# Altium PCB PCB.PcbDoc
Units mil, origin at the board's own origin, x right, y up, seen from the top; angles counter-clockwise.
Board outline 1780.61 x 1630.16 mil, 2 copper layers (Top Layer, Bottom Layer); 38 components, 46 nets, 181 pads, 91 vias.
Unrouted connection lines stored in the file: 17.
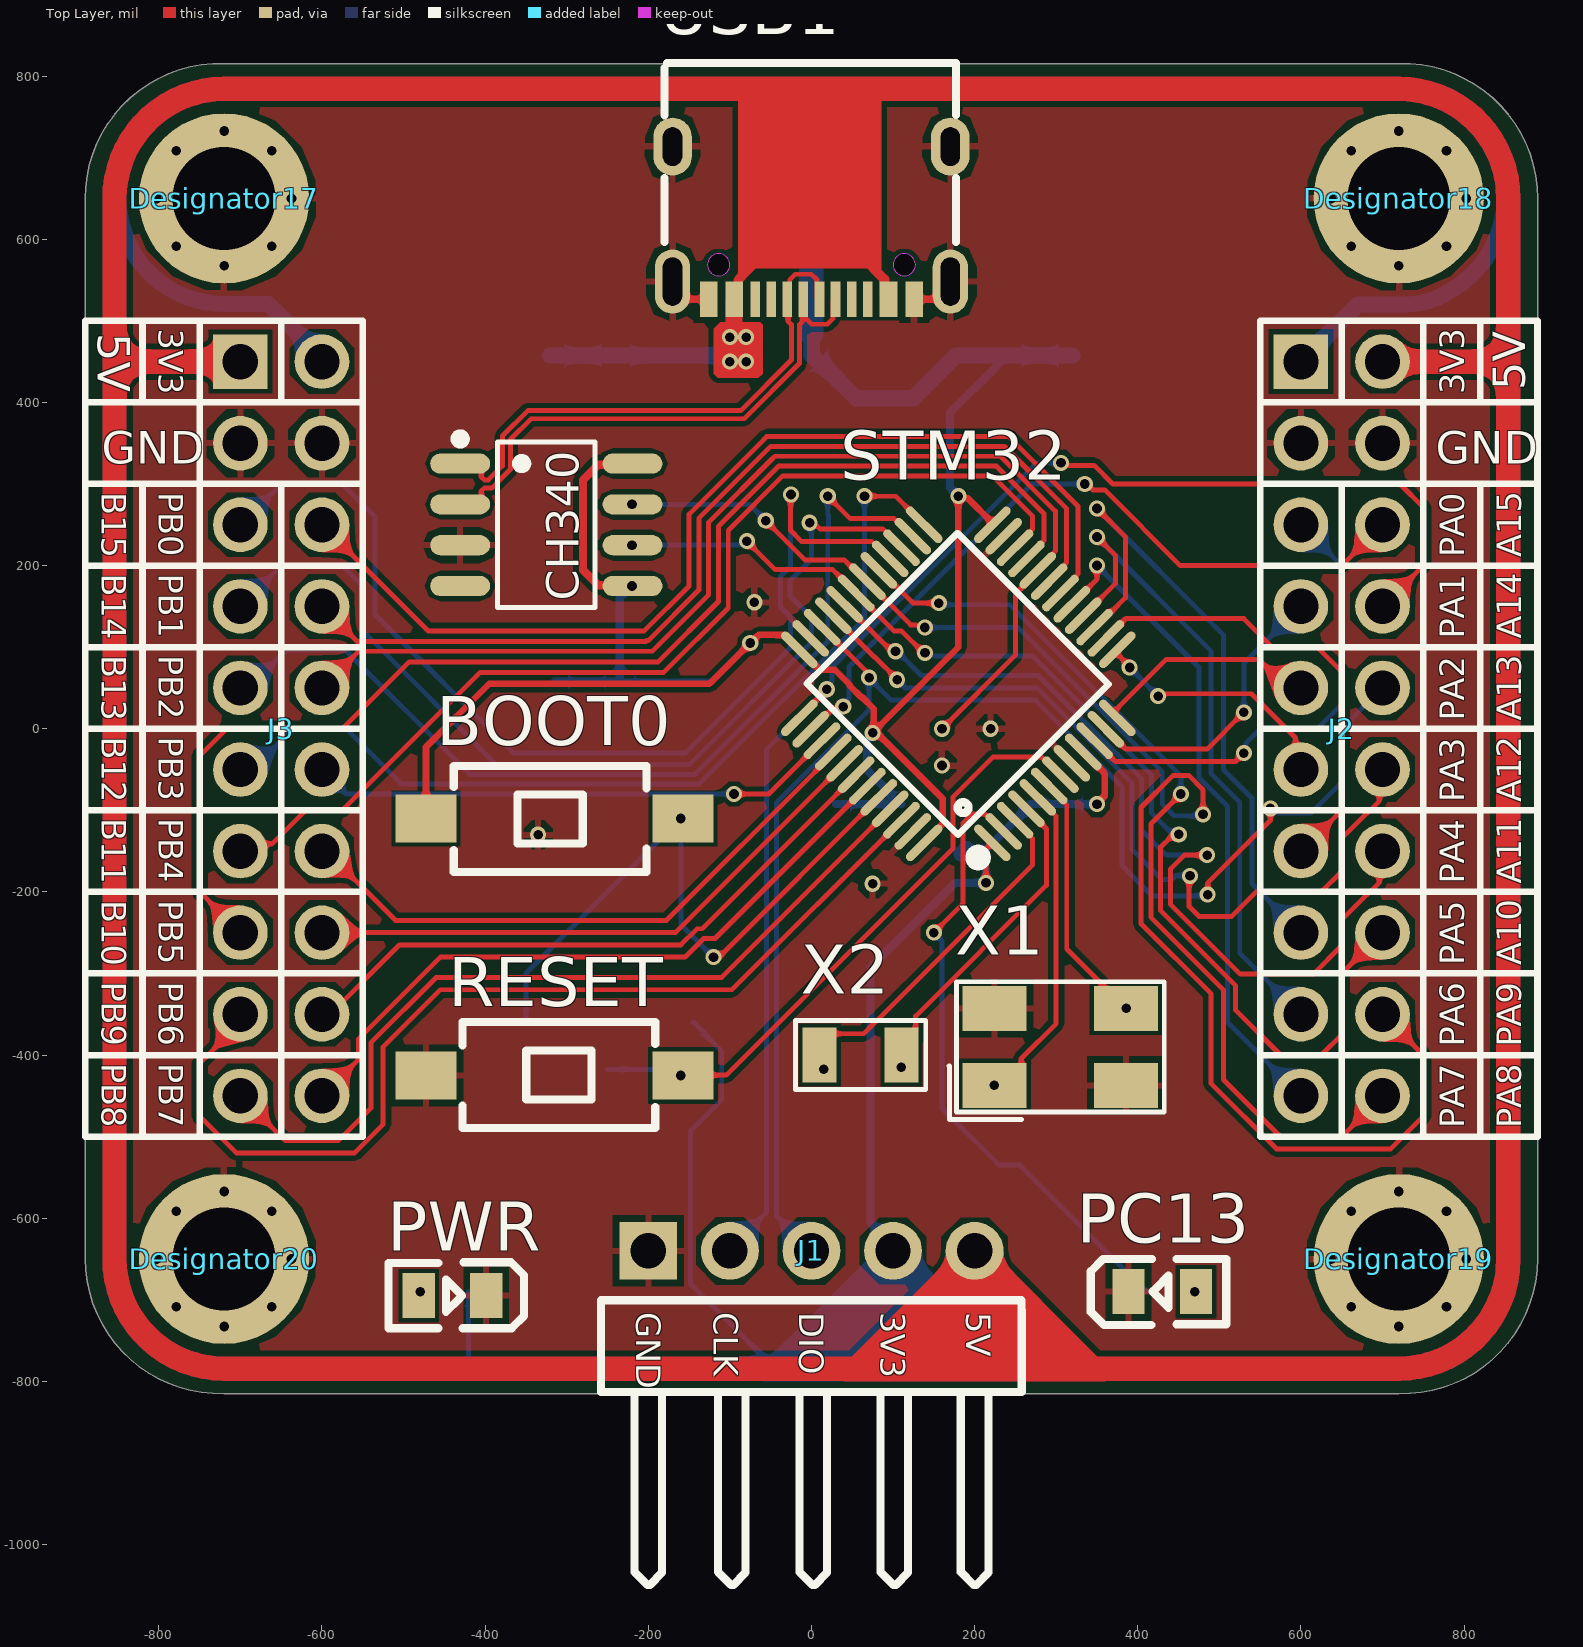
[diagram p0: Top Layer view]
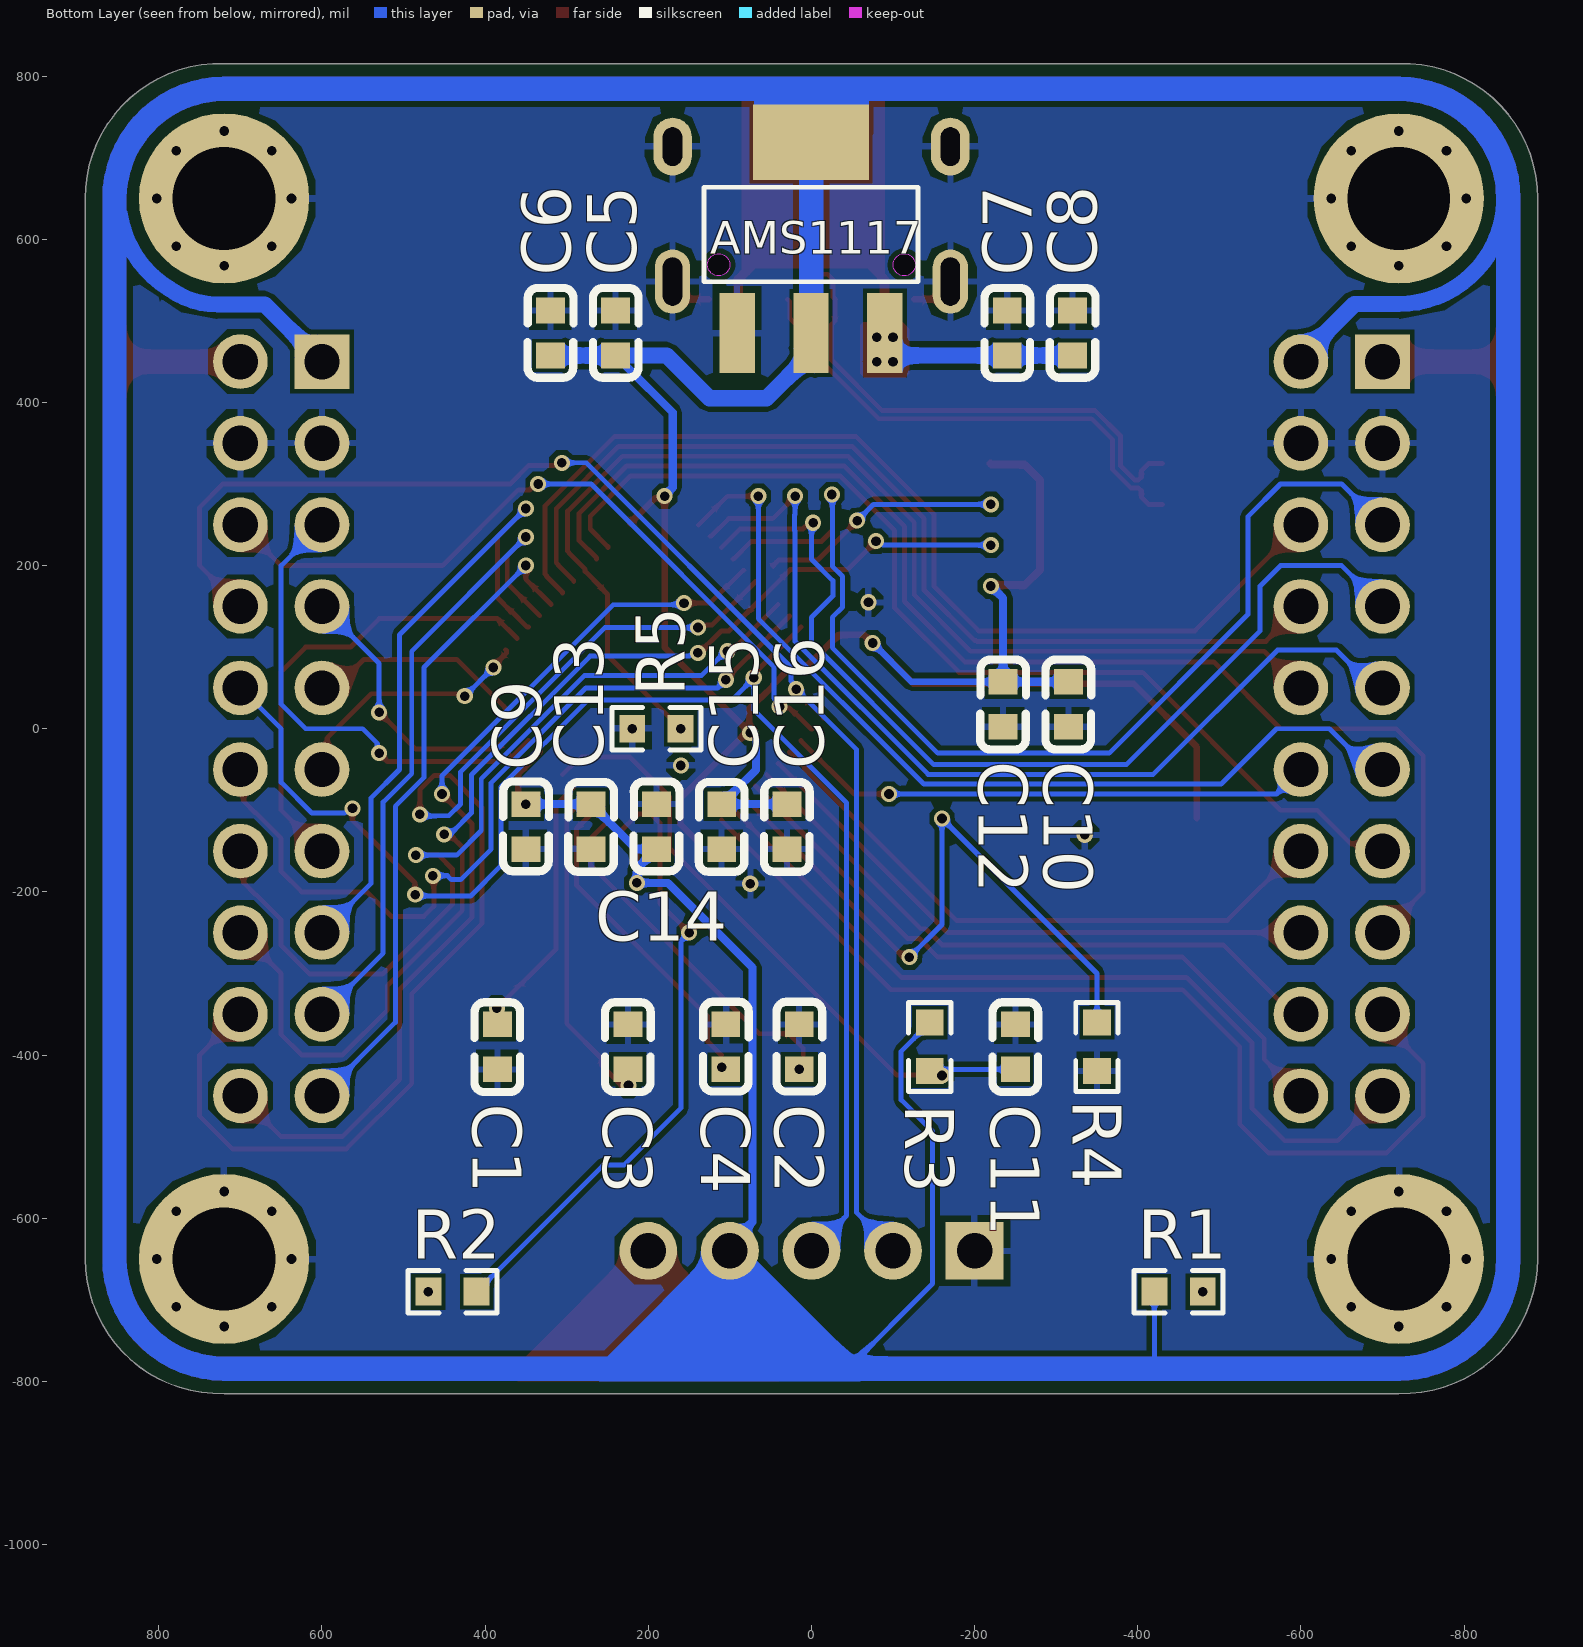
[diagram p1: Bottom Layer view, seen from below]

## Layer stack, top to bottom
Top Solder: solder mask 0.4, Solder Resist, Dk 3.5
Top Layer: signal copper 1.4
Dielectric 1: dielectric 12.6, FR-4, Dk 4.8
Bottom Layer: signal copper 1.4
Bottom Solder: solder mask 0.4, Solder Resist, Dk 3.5

## Board outline
-890,-650 ccw(c-725,-650) -720.15,-814.93 719.85,-814.92 ccw(c725,-650) 890,-650 890.3,650 ccw(c725,650) 720.14,815.23 -720.14,815.23 ccw(c-725,650) -890.3,650

## Design rules (kind name [scope] priority, off if disabled: settings)
Clearance [All] p1: gap=6 ignorepadtopadclearanceinfootprint=TRUE except(0: Arc-Hole Track-Hole SMDPad-Hole THPad-Via THPad-Hole Via-Hole Fill-Hole Poly-Hole Region-Hole Text-Hole; 4: Arc-Arc Arc-Track Track-Track; 5: SMDPad-Fill SMDPad-Poly SMDPad-Region SMDPad-Text)
DiffPairsRouting [All] p1: maxlimit=10 minlimit=4 mostfreqgap=4 toplayer_minwidth=5 toplayer_maxwidth=15 toplayer_prefwidth=5 bottomlayer_minwidth=5 bottomlayer_maxwidth=15 bottomlayer_prefwidth=5 maxuncoupledlength=500
HoleSize [All] p1: absolutevalues=TRUE maxlimit=500 minlimit=1 maxpercent=80.000 minpercent=20.000
HoleToHoleClearance [All] p1: gap=6 allowstackedmicrovias=TRUE
MinimumSolderMaskSliver [All] p1: minsoldermaskwidth=0
PasteMaskExpansion [All] p1: expansion=2
PlaneClearance [All] p1: clearance=10
PlaneConnect [All] p1: planeconnectstyle=Relief reliefexpansion=10 reliefentries=4 reliefconductorwidth=10 reliefairgap=2
PolygonConnect [All] p1: connectstyle=Relief reliefconductorwidth=8 reliefentries=4 polygonreliefangle="90 Angle" airgapwidth=8
RoutingVias [All] p1: holewidth=28 width=50 viastyle="Through Hole" minholewidth=5 minwidth=5 maxholewidth=500 maxwidth=500
SilkToSilkClearance [All] p1: silktosilkclearance=0
SilkToSolderMaskClearance [IsPad] p1: minsilkscreentomaskgap=0 clearancetoexposedcopper=TRUE
SolderMaskExpansion [All] p1: expansion=4 istentingtop=FALSE
Width [All] p1: maxlimit=50 minlimit=1 preferedwidth=6 minimp=50.000000 maximp=50.000000 favimp=50.000000
21 further rules are at their usual default settings.

## Classes and differential pairs
component class 原理图: AMS1117 BOOT0 C1 C2 C3 C4 C5 C6 C7 C8 C9 C10 C11 C12 C13 C14 C15 C16 CH340 J1 J2 J3 PC13 PWR R1 R2 R3 R4 R5 RESET STM32 USB1 X1 X2
differential pair UD: +UD_P -UD_N

## Components (designator, comment, footprint, x,y, rotation, side; value= is the part's Value field where it differs from the comment)
AMS1117 "AMS1117-3.3_C6186" SOT-223-3_L6.5-W3.4-P2.30-LS7.0-BR 0.55,601.93 r270 bottom (schematic designator U1)
BOOT0 "KEY" SW_2P -315,-110 r0 top (schematic designator Key1)
C1 "10pF" C0603 385,-390 r90 bottom
C2 "12.5pF" C0603 15,-390 r270 bottom
C3 "10pF" C0603 225,-390 r90 bottom
C4 "12.5pF" C0603 105,-390 r270 bottom
C5 "10uF" C0603 240,485 r270 bottom
C6 "100nF" C0603 320,485 r270 bottom
C7 "10uF" C0603 -240,485 r270 bottom
C8 "100nF" C0603 -320,485 r270 bottom
C9 "10uF" C0603 350,-120 r270 bottom
C10 "10uF" C0603 -315,30 r90 bottom
C11 "10uF" C0603 -250,-390 r90 bottom
C12 "100nF" C0603 -235,30 r90 bottom
C13 "100nF" C0603 270,-120 r90 bottom
C14 "100nF" C0603 190,-120 r270 bottom
C15 "100nF" C0603 110,-120 r90 bottom
C16 "100nF" C0603 30,-120 r90 bottom
CH340 "CH340N" SOP-8_L4.9-W3.9-P1.27-LS6.0-BL -325,250 r270 top (schematic designator U3)
Designator17 "Comment" M3 -720,650 r0 top
Designator18 "Comment" M3 720,650 r0 top
Designator19 "Comment" M3 720,-650 r0 top
Designator20 "Comment" M3 -720,-650 r0 top
J1 "5P" 5P-P2.54 0,-640 r0 top locked
J2 "2x10P" 2X10P-P2.54 650,0 r270 top locked
J3 "2x10P" 2X10P-P2.54 -650,0 r270 top locked
PC13 "LED_R" LED0805 430,-690 r0 top (schematic designator LED2)
PWR "LED_R" LED0805 -440,-695 r180 top (schematic designator LED1)
R1 "1kΩ" R0603 -450,-690 r180 bottom
R2 "1kΩ" R0603 440,-690 r0 bottom
R3 "10kΩ" R0603 -145,-390 r270 bottom
R4 "10kΩ" R0603 -350,-390 r270 bottom
R5 "10kΩ" R0603 190,0 r0 bottom
RESET "KEY" SW_2P -315,-425 r180 top (schematic designator Key2)
STM32 "STM32F103C8T6" STM32F103C8T6 180,55 r45 top (schematic designator U2)
USB1 "TYPE-C_16PIN" USB-C-SMD_TYPE-C-16PIN 0,620 r180 top locked
X1 "8MHz" SMD_4P_5032 305,-390 r0 top
X2 "32.768KHz" SMD_2P_3215 60.2,-400 r180 top

## Footprints (in the part's own frame and the unit in brackets; to place one, negate y for a bottom-side part, rotate by r counter-clockwise, add the part's x,y. Pads: shape width x height; smd on the part's side, far side on the other; paste and mask are expansions set on the pad)
2X10P-P2.54 [mm]
  rect 1.7x1.7 hole 1.1: 1(-11.43,-1.27)
  round 1.7 hole 1.1: 2(-8.89,-1.27) 3(-6.35,-1.27) 4(-3.81,-1.27) 5(-1.27,-1.27) 6(1.27,-1.27) 7(3.81,-1.27) 8(6.35,-1.27) 9(8.89,-1.27) 10(11.43,-1.27) 11(-11.43,1.27) 12(-8.89,1.27) 13(-6.35,1.27) 14(-3.81,1.27) 15(-1.27,1.27) 16(1.27,1.27) 17(3.81,1.27) 18(6.35,1.27) 19(8.89,1.27) 20(11.43,1.27)
  silkscreen extent -12.7,-2.54 12.7,2.54
5P-P2.54 [mm]
  rect 1.8x1.8 hole 1.1: 1(-5.08,0)
  round 1.8 hole 1.1: 2(-2.54,0) 3(0,0) 4(2.54,0) 5(5.08,0)
  silkscreen extent -6.55,-10.4 6.55,-1.54
C0603 [mm]
  rect 0.8x0.9 smd: 1(-0.7,0) 2(0.7,0)
  silkscreen extent -1.41,-0.71 1.39,0.72
LED0805 [mm]
  rect 1x1.4 smd: 1(1.05,0) 2(-1.05,0)
  silkscreen extent -2.22,-1.04 1.99,1.01
M3 [mm]
  round 5.3 hole 3.2: M3(0,0)
R0603 [mil]
  rect 31.75x34.02 smd paste-3937.01 mask+2: 1(-29.66,0) 2(29.66,0)
  silkscreen extent -55,-26 55,26
SMD_2P_3215 [mm]
  rect 1.05x1.7 smd: 1(-1.275,0) 2(1.275,0)
  silkscreen extent -2.03,-1.08 2.03,1.08
SMD_4P_5032 [mm]
  rect 2x1.4 smd: 1(-2.05,-1.2) 2(2.05,-1.2) 3(2.05,1.2) 4(-2.05,1.2)
  silkscreen extent -3.46,-2.26 3.24,2.03
SOP-8_L4.9-W3.9-P1.27-LS6.0-BL [mm]
  oval 0.63x1.865 smd: 1(-1.905,-2.682) 2(-0.635,-2.682) 3(0.635,-2.682) 4(1.905,-2.682) 5(1.905,2.682) 6(0.635,2.682) 7(-0.635,2.682) 8(-1.905,2.682)
  silkscreen extent -2.82,-2.83 2.58,1.52
SOT-223-3_L6.5-W3.4-P2.30-LS7.0-BR [mm]
  rect 2.5x1.1 smd: 1(2.97,-2.3) 2(2.97,0) 3(2.97,2.3)
  rect 2.34x3.6 smd: 4(-2.97,0)
  silkscreen extent -1.57,-3.33 1.37,3.33
STM32F103C8T6 [mm]
  oval 0.27x1.5 smd paste+0 mask+0.05: 1(-2.75,-4.25) 2(-2.25,-4.25) 3(-1.75,-4.25) 4(-1.25,-4.25) 5(-0.75,-4.25) 6(-0.25,-4.25) 7(0.25,-4.25) 8(0.75,-4.25) 9(1.25,-4.25) 10(1.75,-4.25) 11(2.25,-4.25) 12(2.75,-4.25) 25(2.75,4.25) 26(2.25,4.25) 27(1.75,4.25) 28(1.25,4.25) 29(0.75,4.25) 30(0.25,4.25) 31(-0.25,4.25) 32(-0.75,4.25) 33(-1.25,4.25) 34(-1.75,4.25) 35(-2.25,4.25) 36(-2.75,4.25)
  oval 1.5x0.27 smd paste+0 mask+0.05: 13(4.25,-2.75) 14(4.25,-2.25) 15(4.25,-1.75) 16(4.25,-1.25) 17(4.25,-0.75) 18(4.25,-0.25) 19(4.25,0.25) 20(4.25,0.75) 21(4.25,1.25) 22(4.25,1.75) 23(4.25,2.25) 24(4.25,2.75) 37(-4.25,2.75) 38(-4.25,2.25) 39(-4.25,1.75) 40(-4.25,1.25) 41(-4.25,0.75) 42(-4.25,0.25) 43(-4.25,-0.25) 44(-4.25,-0.75) 45(-4.25,-1.25) 46(-4.25,-1.75) 47(-4.25,-2.25) 48(-4.25,-2.75)
  silkscreen extent -3.59,-4.46 3.3,3.34
SW_2P [mm]
  rect 1.9x1.5 smd: 1(-4,0) 2(4,0)
  silkscreen extent -3.14,-1.67 2.86,1.63
USB-C-SMD_TYPE-C-16PIN [mm]
  rect 0.55x1.1 smd paste-100 mask+0.05: 1(-3.2,2.375) 2(-2.4,2.375) 11(2.4,2.375) 12(3.2,2.375)
  rect 0.3x1.1 smd paste-100 mask+0.05: 3(-1.75,2.375) 4(-1.25,2.375) 5(-0.75,2.375) 6(-0.25,2.375) 7(0.25,2.375) 8(0.75,2.375) 9(1.25,2.375) 10(1.75,2.375)
  oval 1.1x2 hole 0.6 slot 1.5 at 90 deg paste+0 mask+0.05: 13(-4.325,1.825) 14(4.325,1.825)
  oval 1.2x1.8 hole 0.6 slot 1.2 at 90 deg paste+0 mask+0.05: 13(-4.325,-2.375) 14(4.325,-2.375)
  Keep-Out Layer board cut-out: 3.24,1.305 3.191,1.477 3.063,1.603 2.89,1.649 2.717,1.603 2.589,1.477 2.54,1.305 2.54,1.305 2.589,1.133 2.717,1.007 2.89,0.961 3.063,1.007 3.191,1.133 3.24,1.305
  Keep-Out Layer board cut-out: -2.54,1.305 -2.589,1.477 -2.717,1.603 -2.89,1.649 -3.063,1.603 -3.191,1.477 -3.24,1.305 -3.24,1.305 -3.191,1.133 -3.063,1.007 -2.89,0.961 -2.717,1.007 -2.589,1.133 -2.54,1.305
  silkscreen extent -4.5,-4.97 4.57,0.6

## Part data
AMS1117: library part AMS1117-3.3, Dropout Voltage=1.3V@(800mA), JLCPCB Part Class="Basic Part", LCSC Part Name="输出3.3V 1A", Manufacturer=AMS, MAX Output Current=1A, Maximum Input Voltage=-, Output Voltage=3.3V, Power Supply Rejection Ratio (PSRR)=72dB@(120Hz), Add into BOM=yes, Convert to PCB=yes, Datasheet=https://atta.szlcsc.com/upload/public/pdf/source/20180727/C6186_7A095716F0823C02F1997A905E26C086.pdf, Device=AMS1117-3.3_C6186, Feature=-, Manufacturer Part=AMS1117-3.3, Noise=-, Number of Outputs=1, Operating Temperature=-, Output Polarity=正极, Output Type=固定, standby current=-, Supplier=LCSC, Supplier Footprint=SOT-223-3, Supplier Part=C6186, Symbol=AMS1117-3.3
C1 C2 C3 C4 C5 C6 C7 C8 C9 C10 C11 C12 C13 C14 C15 C16: library part CAP
CH340: JLCPCB Part Class="Extended Part", LCSC Part Name="USB转串口芯片 CH340", Manufacturer=WCH(南京沁恒), Add into BOM=yes, Convert to PCB=yes, Datasheet=https://atta.szlcsc.com/upload/public/pdf/source/20230530/6E401E9554E9F5311886CC8B3F89B62E.pdf, Device=CH340N, Manufacturer Part=CH340N, Supplier=LCSC, Supplier Footprint=SOP-8, Supplier Part=C2977777, Symbol=CH340N_C2977777
PC13 PWR: library part LED
R1 R2 R3 R4 R5: library part RES
STM32: JLCPCB Part Class="Extended Part", LCSC Part Name="STM32F103C8T6 MSL=3", Low-Voltage Detect=有, Manufacturer=ST(意法半导体), Operating Temperature Range=-40℃~+85℃, Operating Voltage Range=2V~3.6V, ADC (Bit)=12bit, Add into BOM=yes, CCP Capture/Compare=-, communication protocol=-, Convert to PCB=yes, CPU Core=CM3, CPU Maximum Speed=72MHz, DAC (Bit)=-, Datasheet=https://atta.szlcsc.com/upload/public/pdf/source/20220812/8363ACEC51AD55ECEB84799464F7CB85.pdf, Device=STM32F103C8T6, Direct Memory Access=有, GPIO Ports Number=37, Infrared Data Association=有, Internal Comparator=-, Internal Oscillator=有, Manufacturer Part=STM32F103C8T6, Peripheral/Function=看门狗；DMA；看门狗；片载温度传感器, Program Memory Type=FLASH, Program Storage Size=64KB, PWM (Bit)=-, RAM Size=20KB, Real-Time Clock=-, Secure Digital Input and Output=-, Supplier=LCSC, Supplier Footprint=LQFP-48(7x7), Supplier Part=C8734, Symbol=STM32F103C8T6, Universal Serial Bus=有, Watchdog=有
USB1: Current Rating - Power (Max)=5A, JLCPCB Part Class="Extended Part", LCSC Part Name="Type-C 母 卧贴", Manufacturer="SHOU HAN(首韩)", Manufacturer Part="TYPE-C 16PIN 2MD(073)", Operating Temperature Range=-25℃~+85℃, Add into BOM=yes, Connector Type=Type-C, Convert to PCB=yes, Datasheet=https://atta.szlcsc.com/upload/public/pdf/source/20211123/39B17C16241EAC15C5E277BDA434118E.pdf, Device="TYPE-C 16PIN 2MD(073)", Gender=母, Mounting Style=卧贴, Number of Contacts=16P, Number of Ports=1, Standard=-, Supplier=LCSC, Supplier Footprint=SMD, Supplier Part=C2765186, Symbol="TYPE-C 16PIN 2MD(073)"
X1: library part 晶振
X2: library part 晶振_1

## Via types
v1: diameter 19.68, hole 11.81, Top Layer to Bottom Layer, 91 vias

## Nets (pads, with @x,y where several pads share a name; then routed paths per layer and width w, separated by ;. In a path a pad name is that pad's centre, name@x,y a point inside that pad or via, vN(x,y) a via of type N, cw(c..) or ccw(c..) an arc to the next point about the centre after c; other vN are vias at no path point)
+5: AMS1117.3 C7.2 C8.2 J1.5 J2.11 J3.1 USB1.2 USB1.11 | length 7680.5
  Top Layer w12: USB1.11 -89.67,531.32 -89.67,549.66 -84.01,556.82 ; -84.01,780.32 -84.01,556.82 ; 80,774.33 80,560.5 ; USB1.2 89.66,531.32 89.66,550.84 80,560.5 ; -84.01,556.82 -70.68,570.15 70.35,570.15 80,560.5
  Top Layer w30: J3.1 -854.33,450 ; J2.11 854.33,450 ; -854.33,450 -854.33,650 cw(c-720,650) -720,784.33 70,784.33 720,784.33 cw(c720,650) 854.33,650 854.33,594.36 854.33,450 ; -854.33,450 -854.33,-650 ccw(c-720,-650) -720,-784.33 55.67,-784.33 J1.5 344.33,-784.33 720,-784.33 ccw(c720,-650) 854.33,-650.33 854.33,450
  Bottom Layer w20: C8.2 C7.2 -87.44,457.44 v1(-80,450)
  other v1: -100,450 -100,480 -80,480
BOOT0: BOOT0.2 R4.1 STM32.44 | length 799.3
  Top Layer w6: v1(-120,-280) -117.38,-277.38 -110.62,-277.38 STM32.44
  Bottom Layer w6: R4.1 -350,-300 v1(-160,-110) -160,-240 v1(-120,-280)
BOOT1: J3.15 R5.1 STM32.20 | length 1420.9
  Top Layer w6: J3.15 -555,95 -195,95 -126,164 -126,253 -49,330 -48.94,330 -44.94,334 231.71,334 298.95,266.76 298.95,217.64 296.87,215.56 296.87,214.88 277.43,195.45 STM32.20 277.43,192.94 258,173.51 258,172.81 250,164.82 250,90 v1(160,0)
GND: AMS1117.1 C1.1 C2.1 C3.2 C4.1 C5.1 C6.1 C7.1 C8.1 C9.2 C10.1 C11.2 C12.1 C13.1 C14.1 C15.1 C16.1 CH340.3 Designator17.M3 Designator18.M3 Designator19.M3 Designator20.M3 J1.1 J2.2 J2.12 J3.2 J3.12 PC13.2 PWR.2 R4.2 R5.2 RESET.2 STM32.8 STM32.23 STM32.35 STM32.47 USB1.1 USB1.12 USB1.13 USB1.14 X1.2 X1.4 | length 112.8
  Top Layer w8: USB1.14@-170.27,548.14 -170.27,542.8 -153.97,526.49 USB1.12 ; USB1.1 153.97,526.49 170.28,542.81 USB1.13@170.28,548.14
  other v1: -720,-732.68 720,-732.68 -778.46,-708.46 -661.54,-708.46 661.54,-708.46 778.46,-708.46 -802.68,-650 -637.32,-650 637.32,-650 802.68,-650 -778.46,-591.54 -661.54,-591.54 661.54,-591.54 778.46,-591.54 -720,-567.32 720,-567.32 75,-190 -335,-130 160,-45 219.66,0 -70,155 -720,567.32 720,567.32 -778.46,591.54 -661.54,591.54 661.54,591.54 778.46,591.54 -802.68,650 -637.32,650 637.32,650 802.68,650 -778.46,708.46 -661.54,708.46 661.54,708.46 778.46,708.46 -720,732.68 720,732.68
NetLED1_1: PWR.1 R1.2
  other v1: -479.66,-690
NetLED2_1: PC13.1 R2.2
  other v1: 469.66,-690
NRST: C11.1 R3.2 RESET.1 STM32.7 | length 762.5
  Top Layer w6: v1(-160,-425) RESET.1 -157.15,-424.63 -104.63,-424.63 173.68,-146.32 173.68,-83.62 222.47,-34.84 281.82,-34.84 285.33,-38.35 287.26,-38.35 STM32.7
  Bottom Layer w6: C11.1 R3.2@-160,-417.56
OCS_8M_IN: C3.1 STM32.5 X1.1 | length 398.7
  Top Layer w6: v1(224.29,-437.24) 232.77,-437.24 257.33,-412.68 257.33,-404.2 300,-361.53 300,-107.14 277.43,-84.58 STM32.5
OCS_8M_OUT: C1.2 STM32.6 X1.3 | length 311.6
  Top Layer w6: STM32.6 291.36,-71.52 313,-93.17 313,-270.05 v1(385.71,-342.76)
OCS_32K_IN: C2.2 STM32.3 X2.2 | length 426.5
  Top Layer w6: X2.2 10,-391.51 27.67,-373.85 64.15,-373.85 76.73,-361.27 76.73,-361.15 84.35,-353.54 84.46,-353.54 271.11,-166.89 271.11,-134.81 249.59,-113.29 STM32.3
  other v1: 15,-417.56
OCS_32K_OUT: C4.2 STM32.4 X2.1 | length 385.6
  Top Layer w6: X2.1 127.63,-382.77 127.63,-352.37 288,-192 288,-122.59 STM32.4
  other v1: 110,-415
PA0: J2.3 STM32.10 | length 589.1
  Top Layer w6: STM32.10 372.44,-40 519.64,-40 529.64,-30 v1(530,-30)
  Bottom Layer w6: v1(530,-30) 532.32,-27.68 532.32,-17.68 550,0 620,0 650,30 650,200 J2.3
PA1: J2.4 STM32.11 | length 356.8
  Top Layer w6: STM32.11 385.27,-25 485,-25 v1(530,20)
  Bottom Layer w6: v1(530,20) 530,80 J2.4
PA2: J2.5 STM32.12 | length 279.7
  Top Layer w6: STM32.12 370.57,17.55 370.57,20.57 435,85 548.51,85 583.51,50 J2.5
PA3: J2.6 STM32.13 | length 311.9
  Top Layer w6: STM32.13 373.88,95.76 373.88,92.73 390,76.61 v1(390,75) ; v1(425,40) 427.62,42.62 435.13,42.62 435.36,42.84 539.46,42.84 593.35,-11.05 593.35,-43.35 J2.6
  Bottom Layer w6: v1(390,75) v1(425,40)
PA4: J2.7 STM32.14 | length 566.8
  Top Layer w6: STM32.14 385.27,135 530,135 565,100 620,100 650,70 650,-100 J2.7
PA5: J2.8 STM32.15 | length 800.2
  Top Layer w6: STM32.15 348.29,124.59 367.72,144.03 368.4,144.03 384.84,160.47 384.84,235.16 v1(350,270)
  Bottom Layer w6: v1(350,270) 505,115 505,-50 540,-85 540,-190 J2.8
PA6: J2.9 STM32.16 | length 811
  Top Layer w6: STM32.16 372.84,178.25 372.84,212.16 v1(350,235)
  Bottom Layer w6: v1(350,235) 490,95 490,-55 525,-90 525,-275 J2.9
PA7: J2.10 STM32.17 | length 813.9
  Top Layer w6: STM32.17 350,183.24 v1(350,200)
  Bottom Layer w6: v1(350,200) 475,75 475,-60 510,-95 510,-360 J2.10
PA8: J2.20 STM32.29 | length 1143.7
  Top Layer w6: STM32.29 83.82,194.19 103.26,174.76 103.93,174.76 124.67,154.02 155.98,154.02 v1(156.15,153.85) ; v1(452.84,-80) 416,-116.84 416,-231 505,-320 505,-430 575,-500 650,-500 J2.20
  Bottom Layer w6: v1(156.15,153.85) 158.02,151.98 243.02,151.98 452.84,-57.84 v1(452.84,-80)
PA9: CH340.7 J2.19 STM32.30 | length 1812.9
  Top Layer w6: v1(-56,255) -8,207 39.99,207 47.28,199.71 STM32.30@47.96,199.71 ; STM32.30 121.63,127.28 128.64,127.28 129.31,126.62 136.38,126.62 v1(139,124) ; v1(480,-105) 480,-74.85 462.3,-57.16 443.38,-57.16 404,-96.54 404,-239 490,-325 490,-435 570,-515 710,-515 750,-475 750,-400 J2.19
  Bottom Layer w6: v1(-220,275) -76,275 v1(-56,255) ; v1(139,124) 253.29,124 430,-52.71 430,-92.3 444.42,-106.73 459.68,-106.73 460.11,-107.16 477.84,-107.16 v1(480,-105)
PA10: CH340.6 J2.18 STM32.31 | length 1424.2
  Top Layer w6: v1(-79.16,230) -44.16,195 26.08,195 101.08,120 110.3,120 137.32,92.98 v1(139.26,92.98) ; v1(450.22,-129.57) 447.6,-132.19 440.84,-132.19 428,-145.03 428,-223 520,-315 520,-345 575,-400 625,-400 650,-375 650,-300 J2.18
  Bottom Layer w6: v1(-220,225) -87.86,225 -82.86,230 v1(-79.16,230) ; v1(139.26,92.98) 141.88,90.36 148.26,90.36 149.62,89 150.96,89 ; 150.98,88.98 271.34,88.98 416.72,-56.4 416.72,-103.2 440.9,-127.38 448.03,-127.38 v1(450.22,-129.57)
PA11: J2.17 STM32.32 | length 1092
  Top Layer w6: STM32.32 v1@95.62,97.62 ; v1(485,-155) 457.09,-155 440,-172.09 440,-215 525.75,-300.75 614.96,-300.75 650,-265.71 650,-234.29 680.75,-203.54 681.46,-203.54 696.05,-188.95 696.05,-153.95 J2.17
  Bottom Layer w6: v1(103,95) 104.94,95 134.94,65 278.35,65 404.72,-61.37 404.72,-124.72 435,-155 v1(485,-155)
PA12: J2.16 STM32.33 | length 1020.7
  Top Layer w6: STM32.33 26.89,138.11 77.24,87.76 77.94,87.76 105,60.7 v1(105,60) ; v1(464.01,-180.38) 462.84,-181.55 462.84,-217.84 475,-230 515,-230 545,-200 625,-200 650,-175 650,-134.29 680.75,-103.54 681.46,-103.54 696.05,-88.95 696.05,-53.95 J2.16
  Bottom Layer w6: v1(105,60) 105.36,60 115.36,50 276.38,50 392.72,-66.34 392.72,-147.72 430,-185 441.3,-185 446.3,-180 463.63,-180 v1(464.01,-180.38)
PA13: J1.3 J2.15 STM32.34 | length 1816.4
  Top Layer w6: STM32.34 65.46,72.1 65.46,71.64 70.7,66.4 v1(70.7,62.7) ; v1(485.68,-203.38) 485.98,-203.09 485.98,-189.02 535,-140 562.68,-112.32 562.68,-105.36 562.62,-105.3 v1(562.62,-97.62)
  Bottom Layer w6: J1.3 -43,-597 -43,-90.7 70.35,22.65 v1@70.35,62.35 ; v1(70.7,62.7) v1@70.35,62.35 ; v1(485.68,-203.38) 484.07,-205 417.7,-205 380.72,-168.02 380.72,-71.31 274.41,35 97.7,35 v1@70.35,62.35 ; v1(562.62,-97.62) 566.32,-97.62 572.24,-103.54 612.18,-103.54 650,-65.71 650,0 J2.15
PA14: J1.2 J2.14 STM32.37 | length 1809.8
  Top Layer w6: STM32.37 -14.87,14.13 18.73,47.73 v1(18.73,48.37) ; v1(305.98,325.98) 308.6,323.36 314.84,323.36 315.36,322.84 346.43,322.84 369.27,300 721.49,300 750,271.49 750,200 J2.14
  Bottom Layer w6: J1.2 -100,-637.82 -55,-592.82 -55,-25.36 v1(18.73,48.37) ; v1@19,48 19,51.7 23.96,56.66 23.96,57.69 25,58.73 25,75 275.98,325.98 v1(305.98,325.98)
PA15: J2.13 STM32.38 | length 912.2
  Top Layer w6: STM32.38 0.3,-0.68 19.74,18.76 20.42,18.76 27.23,25.57 37.57,25.57 v1(38.98,26.98) ; v1(335,300) 338.2,300 345.36,292.84 359.46,292.84 452.3,200 650,200 J2.13
  Bottom Layer w6: v1(38.98,26.98) 38.98,30.68 45.98,37.68 45.98,75.98 270,300 v1(335,300)
PB0: J3.13 STM32.18 | length 1281.5
  Top Layer w6: J3.13 -470,120 -205,120 -150,175 -150,263 -58,355 ; -57.97,355 -54.97,358 241.65,358 326.79,272.86 326.79,189.81 324.71,187.72 324.71,187.04 305.27,167.61 STM32.18
PB1: J3.14 STM32.19 | length 1211.2
  Top Layer w6: J3.14 -557,107 -203,107 -202,108 -200.03,108 -138,170.03 -138,258 -51,345 -50.91,345 -49.91,346 236.68,346 312.87,269.81 312.87,203.73 310.79,201.65 310.79,200.96 291.36,181.52 STM32.19
PB3: J3.16 STM32.39 | length 652.5
  Top Layer w6: v1(-95,-80) -52.44,-80 STM32.39
  Bottom Layer w6: J3.16 -570,-80 v1(-95,-80)
PB4: J3.17 STM32.40 | length 748.8
  Top Layer w6: J3.17 -594.92,-150 -509.92,-235 -177.66,-235 8.88,-48.45 8.88,-46.52 STM32.40
PB5: J3.18 STM32.41 | length 726.8
  Top Layer w6: J3.18 -166.76,-250 STM32.41
PB6: J3.19 STM32.42 | length 776.4
  Top Layer w6: J3.19 -590,-350 -505,-265 -160,-265 -140.16,-245.16 -134.07,-245.16 STM32.42
PB7: J3.20 STM32.43 | length 840.6
  Top Layer w6: J3.20 -555,-405 -555,-380 -455,-280 -155,-280 -132.16,-257.16 -118.24,-257.16 STM32.43
PB8: J3.10 STM32.45 | length 1034.7
  Top Layer w6: J3.10 -645,-505 -580,-505 -540,-465 -540,-385 -460,-305 -110.41,-305 -109.4,-303.99 -96.01,-290.61 STM32.45
PB9: J3.9 STM32.46 | length 1249.4
  Top Layer w6: J3.9 -700,-360 -750,-410 -750,-475 -705,-520 -560,-520 -525,-485 -525,-390 -455,-320 -97.56,-320 STM32.46
PB10: J3.8 STM32.21 | length 1562.2
  Top Layer w6: J3.8 -750,-200 -750,-33.16 -716.84,0 -575,0 -493,82 -188,82 -114,156 -114,247.97 -39.97,322 226.74,322 285.03,263.71 285.03,230.88 263.52,209.36 STM32.21
PB11: J3.7 STM32.22 | length 1285.3
  Top Layer w6: J3.7 -691.05,-141.05 -661.05,-141.05 -620,-100 -575,-100 -406,69 -181,69 -102,148 -102,243 -35,310 221.77,310 271.11,260.66 271.11,244.81 249.59,223.29 STM32.22
PB12: J3.6 STM32.25 | length 1135.8
  Top Layer w6: v1(65,285) 103.12,285 STM32.25
  Bottom Layer w6: J3.6 -685,-50 -635,0 -570,0 -502,-68 -138,-68 65,135 v1(65,285)
PB13: J3.5 STM32.26 | length 1173.1
  Top Layer w6: v1(20,285) 47.53,257.47 101.55,257.47 123.07,235.95 STM32.26
  Bottom Layer w6: J3.5 -690,50 -643.54,96.46 -571.46,96.46 -419,-56 -142.97,-56 20,106.97 20,242.33 20.68,243.01 20.68,261.93 20,262.62 v1(20,285)
PB14: J3.4 STM32.27 | length 1210.5
  Top Layer w6: v1(-2.16,252.47) 0.86,252.47 5.32,248.01 7.34,248.01 10.36,245 87.46,245 STM32.27
  Bottom Layer w6: J3.4 -650,200 -575,200 -550,175 -550,120 -386,-44 -150,-44 0,106 0,136.4 -26.29,162.7 -26.29,181.62 0,207.91 0,250.31 v1(-2.16,252.47)
PB15: J3.3 STM32.28 | length 1335.1
  Top Layer w6: v1(-25,287.16) -25.61,286.55 -25.61,242.93 -12.3,229.63 73.71,229.63 95.23,208.11 STM32.28
  Bottom Layer w6: J3.3 -650,300 -575,300 -535,260 -535,140 -365,-30 -155,-30 -25.68,99.32 -25.68,136.65 -38.29,149.26 -38.29,186.59 -25.68,199.2 -25.68,286.47 v1(-25,287.16)
PC13: R2.1 STM32.2 | length 775.9
  Top Layer w6: v1(150,-250) 185.68,-214.32 185.68,-115.8 197.05,-104.44 212.22,-104.44 214.3,-106.51 214.99,-106.51 234.42,-125.95 STM32.2
  Bottom Layer w6: v1(150,-250) 150,-250.36 160,-260.36 160,-465 230,-535 255.34,-535 396.33,-675.99 397.46,-675.99 410.34,-688.87 R2.1
UD_N: CH340.2 USB1.5 USB1.7 | length 683.1
  Top Layer w6: CH340.2 -413.2,275 -404.52,283.69 -404.52,291.49 -401,295 -391.89,295 -368.9,317.99 -368.9,354.64 -343.54,380 -82.47,380 -14.68,447.79 -14.68,495.39 -10.62,499.46 -10.62,525.72 USB1.7 -6.94,523.59 -6.94,502.99 0.21,495.84 19.48,495.84 26.62,502.98 26.62,523.59 USB1.5
UD_P: CH340.1 USB1.6 USB1.8 | length 666.8
  Top Layer w6: CH340.1 -413.2,325 -404.52,316.31 -404.52,308.51 -401,305 -396.03,305 -378.9,322.14 -378.9,358.78 -347.68,390 -86.62,390 -24.68,451.93 -24.68,495.39 -28.75,499.46 -28.75,525.72 USB1.8 -26.62,529.4 -26.62,550.38 -19.85,557.15 -0.21,557.15 6.94,550 6.94,529.4 USB1.6
VCC: AMS1117.2 AMS1117.4 BOOT0.1 C5.2 C6.2 C9.1 C10.2 C12.2 C13.2 C14.2 C15.2 C16.2 CH340.5 CH340.8 J1.4 J2.1 J3.11 R1.1 R3.1 STM32.1 STM32.9 STM32.24 STM32.36 STM32.48 | length 11687.3
  Top Layer w6: v1(214,-189) 214,-147.63 STM32.1
  Top Layer w8: BOOT0.1 -472.48,-22.48 -395,55 -125,55 v1(-75,105) -74.47,105 -64.47,115 -34.98,115 -34.36,114.38 -32.5,114.38 STM32.36 -14.34,96.75 10.2,72.21 28.6,72.21 46.85,53.96 46.85,52.82 60.82,38.85 61.96,38.85 76.4,24.41 v1@76.4,-3.6 ; v1(75,-5) v1@76.4,-3.6 ; v1@82.35,-7.24 160.76,-85.65 160.76,-116.83 138.25,-139.34 STM32.48 ; STM32.24@222.14,251.97 191.35,282.76 182.24,282.76 v1(180,285) 180,100 v1@76.4,-3.6 ; STM32.9 359.59,-55 359.59,-82.08 350,-91.68 v1(350,-92.44)
  Top Layer w10: v1(-220,175) -221.03,176.03 -261.42,176.03 -280,194.61 -280,305 -261.23,323.77 -220.62,323.77 CH340.8
  Bottom Layer w6: R1.1 -420.34,-783.99 -420,-784.33 ; R3.1 -143.87,-360.34 -130.99,-373.22 -130.99,-374.35 -110,-395.34 -110,-455 -148.43,-493.43 -148.43,-680.23 -44.33,-784.33
  Bottom Layer w8: C12.2 -122.44,57.56 v1(-75,105)
  Bottom Layer w10: C10.2 C12.2 -235,160 v1(-220,175) ; C16.2 C15.2@108.03,-92.44 ; 68,-14.62 68,-50.44 95.28,-77.72 95.28,-79.69 C15.2@108.03,-92.44 ; J1.4 100,-632.39 72.28,-604.68 72.28,-292.58 175.87,-189 v1(214,-189) 214,-171.56 204.72,-162.28 204.72,-160.31 C14.2@191.97,-147.56 ; C15.2 C15.2@108.03,-92.44 ; v1(180,285) 180,285.7 170,295.7 170,387.44 227.28,444.72 227.28,446.69 238.03,457.44 C5.2 ; C14.2 C14.2@191.97,-147.56 ; v1(350,-92.44) C13.2 268.03,-92.44 255.28,-105.19 255.28,-107.16 214.88,-147.56 C14.2@191.97,-147.56
  Bottom Layer w20: -854.33,650 cw(c-868.68,636.07) -848.77,637.96 ccw(c-720,650) -720,520.67 -665.67,520.67 -600,455 J3.11 ; AMS1117.2 0.55,457.44 12.2,445.79 14.21,445.79 55,405 125,405 177.44,457.44 C5.2@238.03,457.44 ; C14.2@184.25,-153.31 C14.2 ; C5.2 C6.2 ; J2.1 670,520 727.91,520 ccw(c727.91,620) 786.83,539.2 cw(c798.57,523.01) 788.01,540 ccw(c720,650) 847.55,628.62 cw(c867.26,625.23) 848.23,631.37 854.33,650
  Bottom Layer w30: AMS1117.2@0,485 0,718.86 0,784.33 ; 0,784.33 720,784.33 cw(c720,650) 854.33,650 854.33,631.37 854.33,628.62 854.33,-650 cw(c720,-650) 720,-784.33 244.33,-784.33 J1.4 -44.33,-784.33 -420,-784.33 -720,-784.33 cw(c-720,-650) -750.92,-780.72 cw(c-720,-650) -854.33,-650 -854.33,637.96 -854.33,650 cw(c-720,650) -720,784.33 0,784.33
pads on no net: CH340.4 USB1.3 USB1.4 USB1.9 USB1.10

## Polygon pours and split planes (outlines as drawn)
GND on Bottom Layer "BOTTOM_GND" (solid, remove dead copper, pour order 1): -890,815 890,815 890,-815 -890,-815
GND on Top Layer "TOP_GND" (solid, remove dead copper, pour order 0): -890,815 890,815 890,-815 -890,-815

## Other copper
Top Layer:
  rectangle net +5: -84.01,570 80,780.32
  region net +5: 200,-640 40,-800 360,-800
  region net +5: -85,525 -85,498 -63,498 -60,495 -60,435 -65,430 -115,430 -120,435 -120,490 -112,498 -105,498 -105,525
Bottom Layer:
  region net VCC: 100,-640 -60,-800 260,-800
  region net VCC: -70,730 -70,785 70,785 70,730

## Silkscreen, mask and mechanical layers (free items; w line width, h text height)
Top Overlay:
  lines w8: -890,-400 -750,-400 ; -890,-300 -750,-300 ; -890,-200 -750,-200 ; -890,-100 -750,-100 ; -890,0 -750,0 ; -890,100 -750,100 ; -890,200 -750,200 ; -890,300 -750,300 ; -890,400 -750,400 ; -820,-500 -820,300 ; -820,400 -820,500 ; 750,-400 890,-400 ; 750,-300 890,-300 ; 750,-200 890,-200 ; 750,-100 890,-100 ; 750,0 890,0 ; 750,100 890,100 ; 750,200 890,200 ; 750,300 890,300 ; 750,400 890,400 ; 820,-500 820,300 ; 820,400 820,500 ; -890,-500 -750,-500 -750,500 -890,500 -890,-500 ; 750,-500 750,500 890,500 890,-500 750,-500
  text "3V3" at -800,490 h30 r270
  text "5V" at -875,485 h40 r270
  text "5V" at 875,415 h40 r90
  text "3V3" at 800,410 h30 r90
  text "GND" at -870,325 h40
  text "GND" at 765,325 h40
  text "B15" at -870,290 h30 r270
  text "PB0" at -800,290 h30 r270
  text "PA0" at 800,210 h30 r90
  text "A15" at 870,210 h30 r90
  text "B14" at -870,190 h30 r270
  text "PB1" at -800,190 h30 r270
  text "PA1" at 800,110 h30 r90
  text "A14" at 870,110 h30 r90
  text "B13" at -870,90 h30 r270
  text "PB2" at -800,90 h30 r270
  text "PA2" at 800,10 h30 r90
  text "A13" at 870,10 h30 r90
  text "B12" at -870,-10 h30 r270
  text "PB3" at -800,-10 h30 r270
  text "PA3" at 800,-90 h30 r90
  text "A12" at 870,-90 h30 r90
  text "B11" at -870,-110 h30 r270
  text "PB4" at -800,-110 h30 r270
  text "PA4" at 800,-190 h30 r90
  text "A11" at 870,-190 h30 r90
  text "B10" at -870,-210 h30 r270
  text "PB5" at -800,-210 h30 r270
  text "PA5" at 800,-290 h30 r90
  text "A10" at 870,-290 h30 r90
  text "PB9" at -870,-310 h30 r270
  text "PB6" at -800,-310 h30 r270
  text "PA6" at 800,-390 h30 r90
  text "PA9" at 870,-390 h30 r90
  text "PB8" at -870,-410 h30 r270
  text "PB7" at -800,-410 h30 r270
  text "PA7" at 800,-490 h30 r90
  text "PA8" at 870,-490 h30 r90
  text "GND" at -215,-715 h30 r270
  text "CLK" at -120,-715 h30 r270
  text "DIO" at -15,-715 h30 r270
  text "3V3" at 85,-715 h30 r270
  text "5V" at 190,-715 h30 r270
Mechanical 1:
  the board outline again, w10
Mechanical 6:
  circle w10: c700,450 r35
  circle w10: c600,-450 r35
  circle w10: c-600,-450 r35
  circle w10: c-700,450 r35
  lines w8: -735,450 -665,450 ; -700,415 -700,485 ; -635,-450 -600,-450 ; -600,-415 -600,-485 -600,-450 ; -565,-450 -600,-450 ; 565,-450 600,-450 635,-450 ; 600,-485 600,-415 ; 665,450 735,450 ; 700,415 700,485
  lines w10: -750,-500 -550,-500 -550,500 -750,500 -750,-500 ; -260,-810 260,-810 260,-590 -260,-590 -260,-810 ; -180,510 180,510 180,820 -180,820 -180,510 ; 550,-500 750,-500 750,500 550,500 550,-500
  text "Type-C" at -150,546.66 h50
  text "PIN" at -670,-480 h60 r90
  text "PIN" at 720,-480 h60 r90
  text "SW_PIN" at -230,-771.67 h50
Mechanical 15:
  lines w8: -1550,-655.38 -1455,-815 ; -1550,655.38 -1455,815 ; -1520,815 -720,815 ; -1515,-815 -715,-815 ; -1360,-655.38 -1455,-815 ; -1360,655.38 -1455,815 ; -1325,-490.38 -1230,-650 ; -1325,490.38 -1230,650 ; -1320,-650 -720,-650 -720,-1075 ; -1320,650 -720,650 -720,1350 ; -1135,-490.38 -1230,-650 ; -1135,490.38 -1230,650 ; -1100,450 -700,450 700,450 ; -1066.04,727.36 -1020,650 ; -1064.73,374.84 -1020,450 ; -1020,-245 -1020,450 ; -1020,790 -1020,650 ; -975.27,725.16 -1020,650 ; -973.96,372.64 -1020,450 ; -890,650 -878.75,1549.93 ; -870,-1015 -720,-1015 ; -797.36,-1061.04 -720,-1015 ; -795.16,-970.27 -720,-1015 ; -720,1390 -879.62,1485 ; -720,1580 -879.62,1485 ; -644.84,945.27 -720,990 ; -642.64,1036.04 -720,990 ; -600,-1075 -600,-450 ; -560.38,1155 -720,1250 ; -560.38,1345 -720,1250 ; -524.84,-1059.73 -600,-1015 -522.64,-968.96 ; -260,-810 260,-590 ; -260,-590 260,-810 ; -180,510 180,820 ; -180,820 180,510 ; -77.36,943.96 0,990 ; -75.16,1034.73 0,990 ; 0,-700 0,665 0,1115 ; 75,-1165 890,-1165 ; 160,-1015 -720,-1015 ; 550,-500 750,500 ; 550,500 750,-500 ; 560.38,1155 720,1250 ; 560.38,1345 720,1250 ; 643.03,-1210.46 720.39,-1164.42 645.23,-1119.69 ; 650,0 1180,0 ; 715,-815 1255,-815 ; 720,-1250 720,-650 1255,-650 ; 720,1350 720,650 1195,650 ; 725,-1165 1015,-1165 ; 730.38,1390 890,1485 ; 730.38,1580 890,1485 ; 890,-1245 890,-650 ; 890,650 890,1550 ; 965.16,-1209.73 890,-1165 ; 967.36,-1118.96 890,-1165 ; 1103.96,77.36 1150,0 ; 1105.27,574.84 1150,650 ; 1118.96,-572.64 1165,-650 1209.73,-574.84 ; 1120.27,-890.16 1165,-815 ; 1165,-1465 1165,-815 ; 1165,-525 1165,-815 ; 1194.73,75.16 1150,0 ; 1196.04,572.64 1150,650 ; 1211.04,-892.36 1165,-815 ; -1455,-815 -1455,815 ; -1230,-650 -1230,650 ; -1020,450 -1020,650 ; -879.62,1485 890,1485 ; -720,990 0,990 ; -720,1250 720,1250 ; 1150,0 1150,650
  text "1780mil" at -260,1495 h100
  text "1440mil" at -245,1260 h100
  text "720mil" at -615,1000 h100
  text "650mil" at 1075,65 h100 r90
  text "200mil" at -1035,-170 h100 r90
  text "1300mil" at -1245,-295 h100 r90
  text "1630mil" at -1475,-305 h100 r90
  text "120mil" at -445,-1000 h100
  text "170mil" at 145,-1140 h100
  text "165mil" at 1145,-1430 h100 r90